# Altium PCB TTFT2.PcbDoc
Units mil, origin at the board's own origin, x right, y up, seen from the top; angles counter-clockwise.
Board outline 1130 x 662.65 mil, 4 copper layers (Top Layer, Internal Plane 1, Internal Plane 2, Bottom Layer), stack 30.634 mil thick; 52 components, 48 nets, 255 pads, 42 vias.
Unrouted connection lines stored in the file: 27.
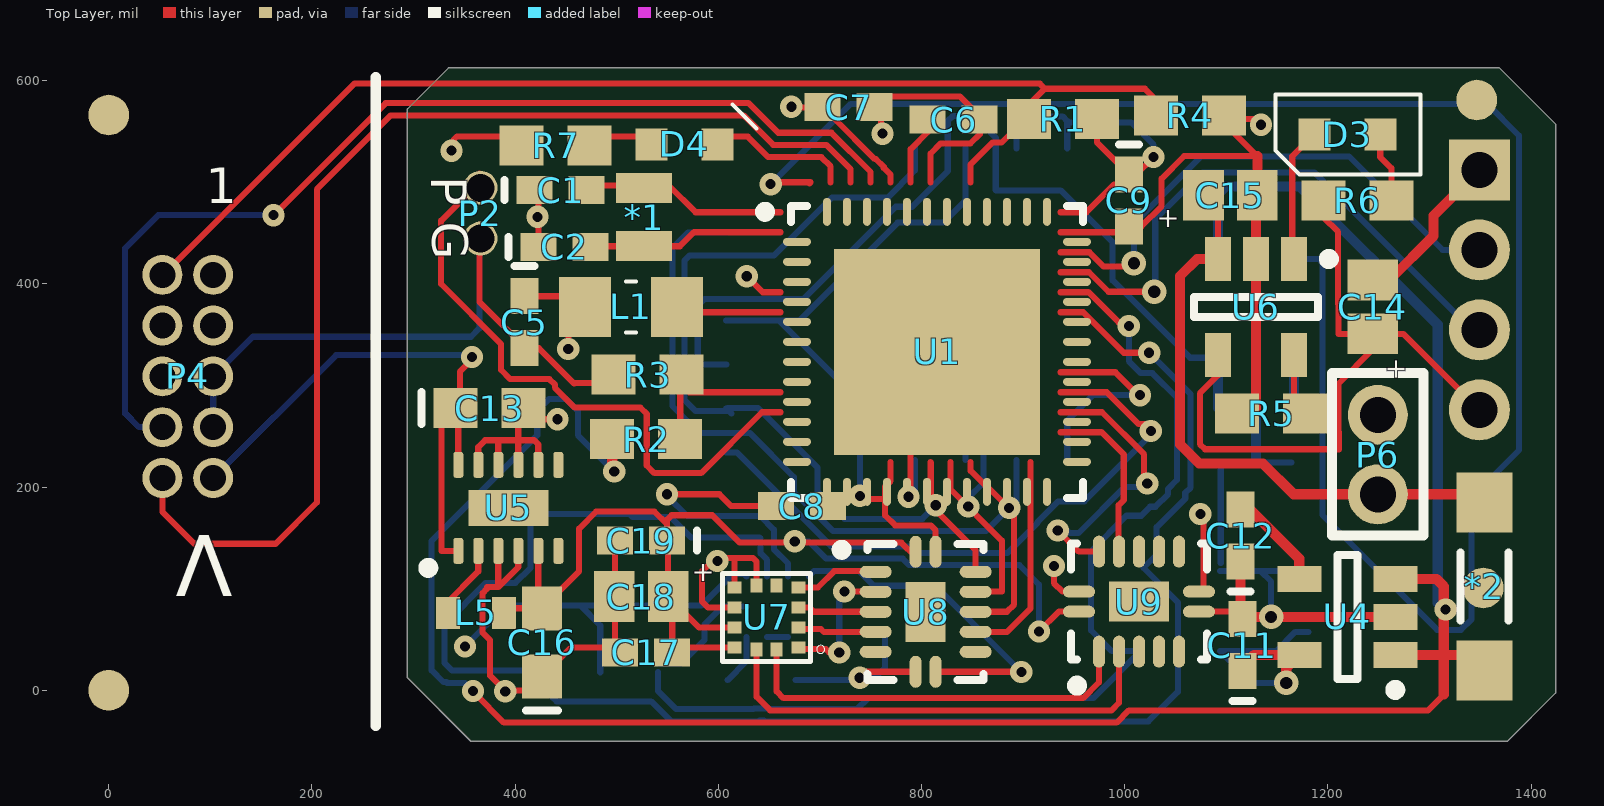
[diagram p0: Top Layer view]
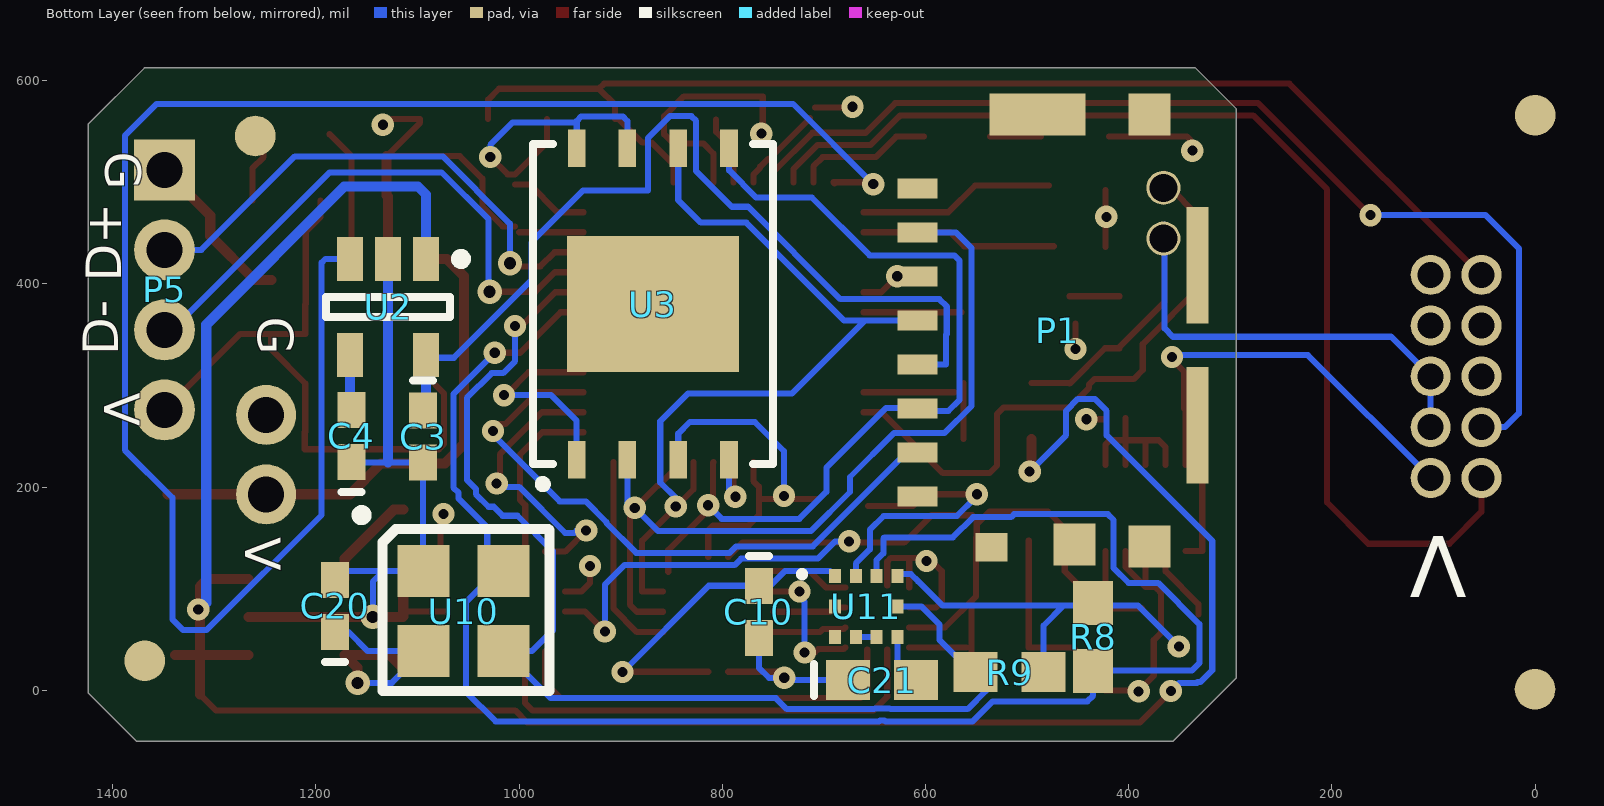
[diagram p1: Bottom Layer view, seen from below]
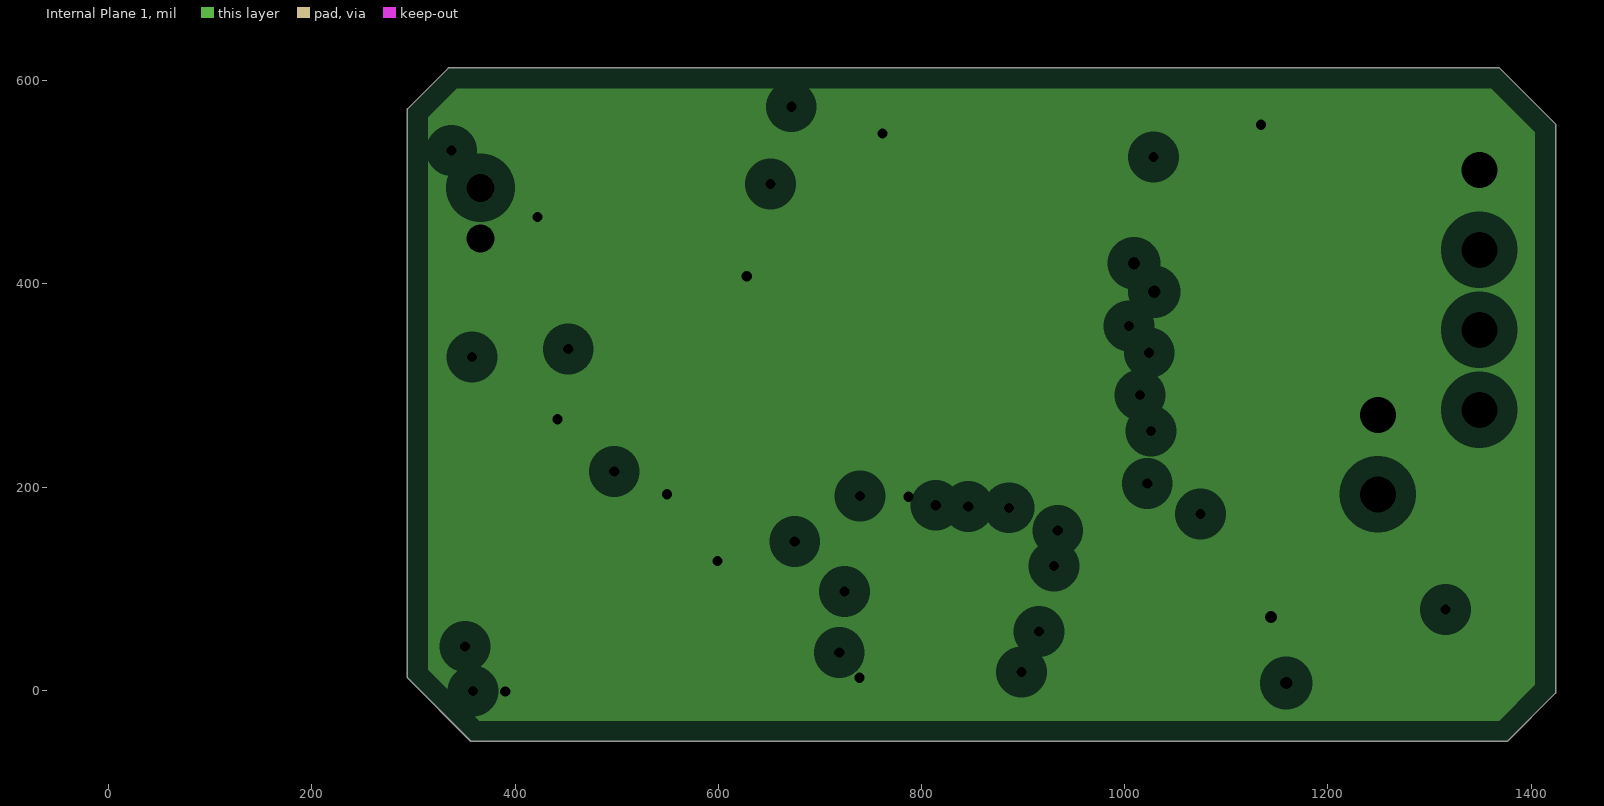
[diagram p2: Internal Plane 1, clearances drawn from the general rule]
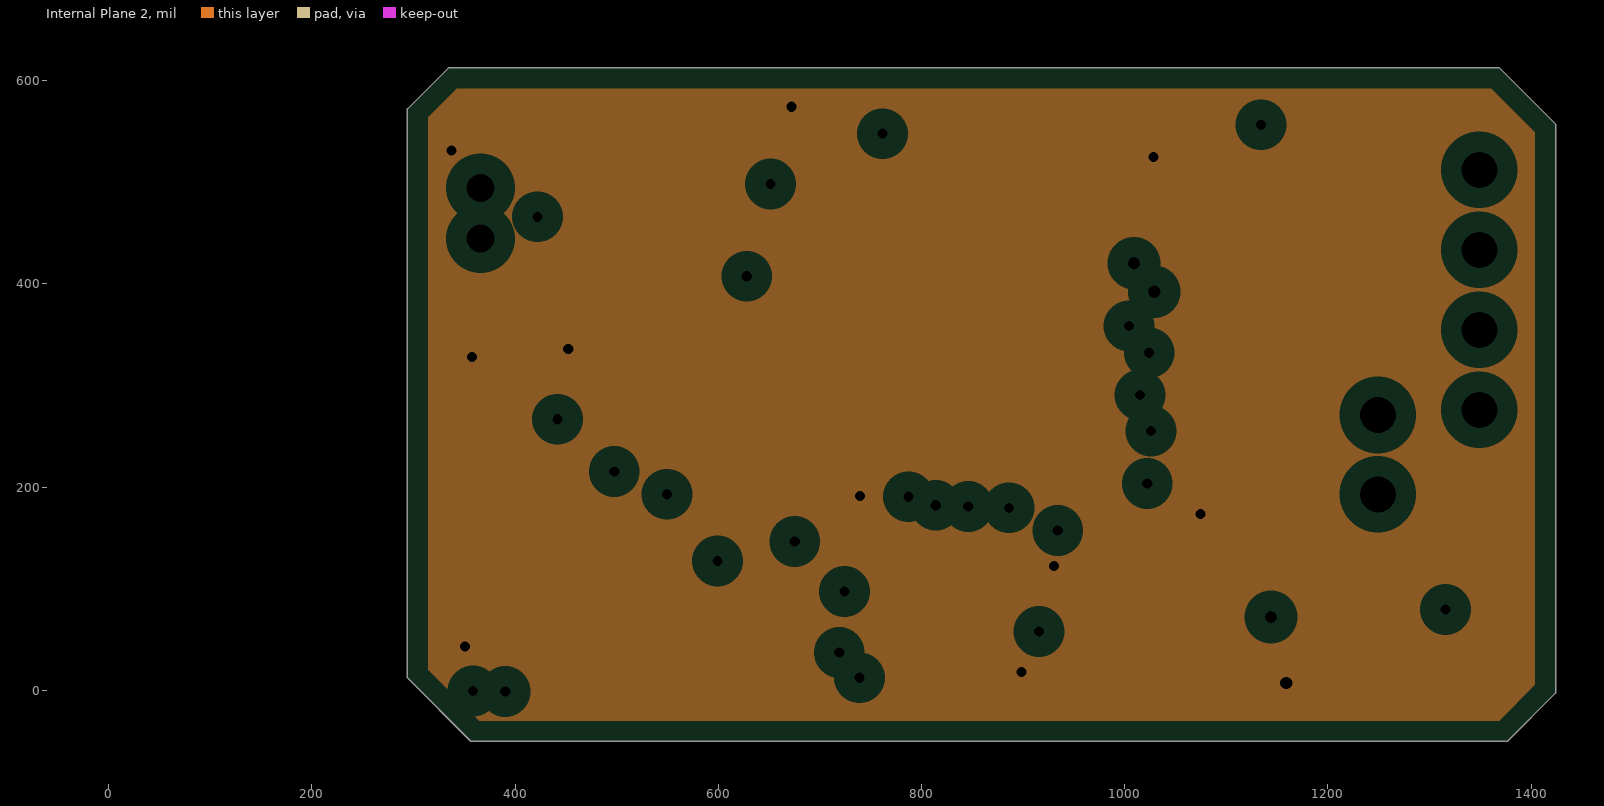
[diagram p3: Internal Plane 2, clearances drawn from the general rule]

## Layer stack, top to bottom
Top Solder: solder mask 0.4, Solder Resist, Dk 3.5
Top Layer: signal copper 1.4
Dielectric 1: core 10, FR-4, Dk 4.2
Internal Plane 1: plane copper 1.417, net GND
Dielectric 3: prepreg 5, Dk 4.2
Internal Plane 2: plane copper 1.417, net VCC
Dielectric 2: core 10, Dk 4.2
Bottom Layer: signal copper 1.4
Bottom Solder: solder mask 0.4, Solder Resist, Dk 3.5

## Board outline
294.02,12.28 294.02,572.28 334.3,612.56 1368.73,612.56 1424.02,557.28 1424.02,-2.72 1376.65,-50.09 356.38,-50.09

## Design rules (kind name [scope] priority, off if disabled: settings)
Clearance [All] p1: gap=6 ignorepadtopadclearanceinfootprint=FALSE except(0: Arc-Hole Track-Hole SMDPad-Hole THPad-Hole Via-Hole Fill-Hole Poly-Hole Region-Hole Text-Hole)
PlaneClearance [All] p1: clearance=20
PlaneConnect [All] p1: planeconnectstyle=Relief reliefexpansion=20 reliefentries=4 reliefconductorwidth=10 reliefairgap=10
PolygonConnect [All] p1: connectstyle=Relief reliefconductorwidth=10 reliefentries=4 polygonreliefangle="90 Angle" airgapwidth=10
RoutingVias [All] p1: holewidth=28 width=50 viastyle="Through Hole" minholewidth=10 minwidth=22 maxholewidth=28 maxwidth=50
SolderMaskExpansion [All] p1: expansion=4 istentingtop=FALSE
Width [All] p1: maxlimit=50 minlimit=6 preferedwidth=6
28 further rules are at their usual default settings.

## Components (designator, comment, footprint, x,y, rotation, side; value= is the part's Value field where it differs from the comment)
*1 "XTAL_ABS06" XTAL-ABS06 527,465.85 r90 top
*2 "Reed_MK24" "Reed MK24-B-3" 1354.02,102.28 r270 top
C1 "22.5pF" 0402 444.82,492.37 r0 top
C2 "22.5pF" 0402 448.46,436.48 r0 top
C3 "1.0uF" 0402 1094.47,249.66 r270 bottom
C4 "10nF" 0402 1165.01,250.43 r90 bottom
C5 "0.1uF" 0402 409.02,362.28 r270 top
C6 "0.1uF" 0402 831.64,561.8 r0 top
C7 "0.1uF" 0402 728.29,573.88 r0 top
C8 "0.1 uF" 0402 682.2,181.37 r180 top
C9 "0.1 uF" 0402 1004.02,482.28 r270 top
C10 "1.0uF" 0402 764.02,77.28 r270 bottom
C11 "1.0uF" 0402 1115.67,44.53 r90 top
C12 "10nF" 0402 1114.02,152.28 r90 top
C13 "C0603" 0603 374.9,277.67 r0 top
C14 "1uF" Tant0805 1244.02,377.28 r270 top
C15 "1uF" Tant0805 1104.02,487.28 r180 top
C16 "C0603" 0603 426.51,47.25 r90 top
C17 "100nF" 0402 529.02,37.28 r180 top
C18 "10uF" Tant0805 524.02,92.28 r0 top
C19 "100nF" 0402 524.02,147.28 r180 top
C20 "0.1uF" 0402 1180.99,83 r90 bottom
C21 "C0603" 0603 642.63,10.09 r180 bottom
D3 "LED_0603" Diode0603 1219.02,547.28 r180 top
D4 "LED_0603" Diode0603 566.65,537.33 r0 top
L1 "300Ohm" "0805 (M2125) Ferrite" 514.02,377.28 r180 top
L5 "2.2uH" "Inductor KLZ1608AHR" 361.3,76.19 r180 top
P1 "microSD" "Molex microSD" 607.8,190.92 r270 bottom
P2 "1x2 1.27mm" "Header1x2 1.27mm" 365.85,494.61 r180 top
P4 "Cortex Debug" Header_2x5_50mil 102.81,408.99 r180 top
P5 "HDR_4x1_2mm" Hdr_4x1_2mm 1349.02,512.28 r0 bottom
P6 "HDR_2x1_2mm" HDR_2x1_2mm 1249.02,192.28 r0 top
R1 "10K" 3-0603 939.02,562.28 r180 top
R2 "100k" 3-0603 529.02,247.28 r180 top
R3 "100k" 3-0603 530.33,310.63 r0 top
R4 "Do not place" 3-0603 1064.06,565.53 r0 top
R5 "2k" 3-0603 1144.02,272.28 r0 top
R6 "330X" 3-0603 1229.02,482.28 r0 top
R7 "330X" 3-0603 439.85,536.02 r0 top
R8 "4.7k" 3-0603 435.04,52.7 r270 bottom
R9 "4.7k" 3-0603 517.18,17.79 r180 bottom
U1 "ATSAMD21GA-MUT" QFN127P600-8N 815.22,333.18 r0 top
U2 "LP3985IM5-3.3" MF05A_N 1129.02,377.28 r270 bottom
U3 "W25Q256JVEIQ_TR" *SON127P800X600X80-9N 868.4,380.13 r90 bottom
U4 "LP3985IM5-3.3" MF05A_N 1219.02,72.28 r180 top
U5 "TPS62740" TPS6274x 344.02,137.28 r90 top
U6 "MCP73831T-2DCI/OT" SOT-23-OT5_N 1129.02,377.28 r270 top
U7 "LIS2DS12" LGA-12 679.02,42.28 r180 top
U8 "Level Shifter" DHVQFN14 804.02,77.28 r0 top
U9 "Level Shifter" DHVQFN14 1014.02,87.28 r90 top
U10 "MS5837" MS5837 1094.02,117.28 r180 bottom
U11 "MMC33160MT" MMC33160MT 689.02,112.28 r180 bottom

## Footprints (in the part's own frame and the unit in brackets; to place one, negate y for a bottom-side part, rotate by r counter-clockwise, add the part's x,y. Pads: shape width x height; smd on the part's side, far side on the other; paste and mask are expansions set on the pad)
3-0603 [mm] "Chip Resistor; Body 1.6 x 0.9 mm (LxW typ)"
  rect 1.1x1 smd: 1(-0.85,0) 2(0.85,0)
0402 [mm] "Chip Capacitor; Body 1.0 x 0.5 mm (LxW typ)"
  rect 0.9x0.7 smd: 1(-0.65,0) 2(0.65,0)
  silkscreen extent -1.4,-0.25 -1.4,0.25
0603 [mm] "Chip Capacitor; Body 1.6 x 0.8 mm (LxW typ)"
  rect 1.1x1 smd: 1(-0.85,0) 2(0.85,0)
  silkscreen extent -1.7,-0.4 -1.7,0.4
"0805 (M2125) Ferrite" [mm] "Chip Resistor; Body 2.0 x 1.3 mm (LxW typ)"
  rect 1.3x1.5 smd: 1(-1.15,0) 2(1.15,0)
  silkscreen extent -0.13,-0.64 0.13,0.64, body extent -1.15,-0.72 1.15,0.73, height 0.81
*SON127P800X600X80-9N [mm]
  rect 0.94x0.44 smd: 1(-3.895,1.905) 2(-3.895,0.635) 3(-3.895,-0.635) 4(-3.895,-1.905) 5(3.895,-1.905) 6(3.895,-0.635) 7(3.895,0.635) 8(3.895,1.905)
  rect 3.4x4.3 smd: 9(0,0)
  silkscreen extent -4.6,-3 4,3
DHVQFN14 [mm] "QFN, 14-Leads, Body 2.50x3.00mm, Pitch 0.50mm, Thermal Pad 1.00x1.50mm, IPC Medium Density"
  oval 0.3x0.8 smd: 1(-0.25,1.5) 7(-0.25,-1.5) 8(0.25,-1.5) 14(0.25,1.5)
  oval 0.8x0.3 smd: 2(-1.25,1) 3(-1.25,0.5) 4(-1.25,0) 5(-1.25,-0.5) 6(-1.25,-1) 9(1.25,-1) 10(1.25,-0.5) 11(1.25,0) 12(1.25,0.5) 13(1.25,1)
  rect 1x1.5 smd: 15(0,0)
  silkscreen extent -2.22,-1.7 1.45,1.7, body extent -1.3,-1.55 1.3,1.55, height 1
Diode0603 [mm]
  rect 0.8x0.8 smd: A(-0.825,0) K(0.825,0)
  silkscreen extent -1.83,-1 1.8,1
HDR_2x1_2mm [mm]
  round 1.5 hole 0.9: 1(0,0.016) 2(0,2)
  silkscreen extent -1.14,-1.02 1.14,3.05
Hdr_4x1_2mm [mil]
  rect 60x60 hole 35.43: 1(0,0)
  round 60 hole 35.43: 2(0,78.74) 3(0,157.48) 4(0,236.22)
"Header1x2 1.27mm" [mm]
  round 0.85 hole 0.7: 1(0,0) 2(0,1.27)
Header_2x5_50mil [mm]
  round 1 hole 0.65: 1(0,0) 2(1.27,0) 3(0,1.27) 4(1.27,1.27) 5(0,2.54) 6(1.27,2.54) 7(0,3.81) 8(1.27,3.81) 9(0,5.08) 10(1.27,5.08)
"Inductor KLZ1608AHR" [mm]
  rect 0.6x0.8 smd: 1(-0.7,0) 2(0.7,0)
LGA-12 [mm] "LIS2DS12"
  rect 0.35x0.3 smd: 1(0,0) 2(0,-0.5) 3(0,-1) 4(0,-1.5) 7(1.6,-1.5) 8(1.6,-1) 9(1.6,-0.5) 10(1.6,0)
  rect 0.3x0.35 smd: 5(0.55,-1.55) 6(1.05,-1.55) 11(1.05,0.05) 12(0.55,0.05)
  silkscreen extent -0.65,-1.85 1.9,0.35
MF05A_N [mm] "SOT23, 5-Leads, Body 2.9x1.6mm, Pitch 0.95mm, Lead Span 2.8mm, IPC Medium Density"
  rect 1.1x0.65 smd: 1(-1.2,0.95) 2(-1.2,0) 3(-1.2,-0.95) 4(1.2,-0.95) 5(1.2,0.95)
  silkscreen extent -1.32,-1.55 0.25,1.95, body extent -0.9,-1.55 0.9,1.55, height 1.19
MMC33160MT [mm] "Memsic magnetometer"
  rect 0.3x0.35 smd: 1(0,0) 2(0,-0.76) 3(0,-1.52) 4(0.52,-1.52) 5(1.04,-1.52) 6(1.56,-1.52) 7(1.56,-0.76) 8(1.56,0) 9(1.04,0) 10(0.52,0)
  silkscreen extent -0.85,0.03 -0.8,0.07
"Molex microSD" [mm] "wicked small microSD"
  rect 0.5x1 smd: 1(0,0) 2(-1.1,0) 3(-2.2,0) 4(-3.3,0) 5(-4.4,0) 6(-5.5,0) 7(-6.6,0) 8(-7.7,0)
  rect 1.05x2.4 smd: ""(-9.55,3)
  rect 1.05x1.05 smd: ""(-9.55,5.8) ""(1.2,3.925) ""(1.25,5.8)
  rect 2.91x0.55 smd: ""(-5.775,7) ""(-1.775,7)
  rect 0.72x0.8 smd: ""(1.275,1.85)
MS5837 [mm]
  rect 1.3x1.3 smd: 1(0,0) 2(0,-2) 3(2,-2) 4(2,0)
  silkscreen extent -1.67,-3 3.15,1.52
QFN127P600-8N [mm]
  oval 0.7x0.2 smd: 1(-3.5,2.75) 2(-3.5,2.25) 3(-3.5,1.75) 4(-3.5,1.25) 5(-3.5,0.75) 6(-3.5,0.25) 7(-3.5,-0.25) 8(-3.5,-0.75) 9(-3.5,-1.25) 10(-3.5,-1.75) 11(-3.5,-2.25) 12(-3.5,-2.75) 25(3.5,-2.75) 26(3.5,-2.25) 27(3.5,-1.75) 28(3.5,-1.25) 29(3.5,-0.75) 30(3.5,-0.25) 31(3.5,0.25) 32(3.5,0.75) 33(3.5,1.25) 34(3.5,1.75) 35(3.5,2.25) 36(3.5,2.75)
  oval 0.2x0.7 smd: 13(-2.75,-3.5) 14(-2.25,-3.5) 15(-1.75,-3.5) 16(-1.25,-3.5) 17(-0.75,-3.5) 18(-0.25,-3.5) 19(0.25,-3.5) 20(0.75,-3.5) 21(1.25,-3.5) 22(1.75,-3.5) 23(2.25,-3.5) 24(2.75,-3.5) 37(2.75,3.5) 38(2.25,3.5) 39(1.75,3.5) 40(1.25,3.5) 41(0.75,3.5) 42(0.25,3.5) 43(-0.25,3.5) 44(-0.75,3.5) 45(-1.25,3.5) 46(-1.75,3.5) 47(-2.25,3.5) 48(-2.75,3.5)
  rect 5.15x5.15 smd paste-1.778: 49(0,0)
  silkscreen extent -4.42,-3.65 3.65,3.65, body extent -3.5,-3.5 3.5,3.5, height 0.85
"Reed MK24-B-3" [mm] "Meder Reed Switch Surface Mount"
  rect 1.5x1.4 smd: 1(-2.1,0) 2(2.1,0)
  silkscreen extent -0.85,-0.6 0.85,0.6, body extent -2.75,-1.1 2.75,1.1, height 1.8
SOT-23-OT5_N [mm] "SOT23, 5-Leads, Body 2.9x1.7mm, Pitch 0.95mm, Lead Span 2.8mm, IPC Medium Density"
  rect 1.1x0.65 smd: 1(-1.2,0.95) 2(-1.2,0) 3(-1.2,-0.95) 4(1.2,-0.95) 5(1.2,0.95)
  silkscreen extent -1.32,-1.55 0.25,1.95, body extent -0.9,-1.55 0.9,1.55, height 1.45
Tant0805 [mil]
  rect 40x50 smd: 1(-26.5,0) 2(26.5,0)
TPS6274x [mm] "QFN, 12-Leads, Body 2.00x3.00mm, Pitch 0.50mm, Thermal Pad 0.90x2.00mm, IPC Medium Density"
  rrect50% 0.65x0.25 smd: 1(0,0) 2(0,-0.5) 3(0,-1) 4(0,-1.5) 5(0,-2) 6(0,-2.5) 7(2.15,-2.5) 8(2.15,-2) 9(2.15,-1.5) 10(2.15,-1) 11(2.15,-0.5) 12(2.15,0)
  rect 0.9x2 smd paste-0.1: 13(1.075,-1.25)
  silkscreen extent -0.55,0.63 -0.3,0.87, body extent 0.03,-2.8 2.12,0.3, height 0.8
XTAL-ABS06 [mm]
  rect 0.75x1.4 smd: 1(-0.725,0) 2(0.725,0)

## Part data
C1 C2 C3 C4 C5 C6 C7 C8 C9 C10 C11 C12 C17 C19 C20: library part C0402, "Ceramic Chip Capacitor - Standard"
C13 C16 C21: "Ceramic Chip Capacitor - Standard"
C14 C15 C18: library part Tant0805
L1: library part "Ferrite 0805(M2125) 3A", "Ferrite 25mOhm@DC,  60 Ohm@100MHz"
L5: library part "Inductor KLZ1608"
P1: library part "microSD Molex tiny"
P2: library part "Header 1x2 1.27mm"
P4: library part CortexDebug
R1 R2 R3 R4 R5 R6 R7 R8 R9: library part ERJ3RK, "Precision Thick Film Chip Resistor, 10 Ohm to 1M Ohm Range, 1% and 0.5% Tolerance, 0603 Size, 0.063 W"
U1: library part ATSAMD21G18
U2 U4: "Micropower, 150mA Low-Noise Ultra Low-Dropout CMOS Voltage Regulator, 5-pin SOT-23"
U3: "Ic Flash 256mbit 104mhz 8wson"
U5: library part TPS6274x
U6: "Miniature Single-Cell, Fully Integrated Li-Ion, Li-Polymer Charge Management Controller, 4.2V, 5-Pin SOT-23, Industrial Temperature, Tape and Reel"
U8 U9: library part NTB0104, "Voltage level translator"
U10: "Pressure/Temp"

## Free pads (board coordinates)
  round 40 smd paste-20 mask+5: 0(-0.11,-0.05) 0(0,566.19) 0(1346.53,580.96) 0(1352.81,100.66)
  round 40 smd far side paste-20 mask+5: 0(0,565.99) 0(0.07,0.93) 0(1259.67,545.58) 0(1368.51,29.02)

## Via types
v1: diameter 22, hole 10, Top Layer to Bottom Layer, 38 vias
v2: diameter 24, hole 12, Top Layer to Bottom Layer, tented bottom, 4 vias

## Nets (pads, with @x,y where several pads share a name; then routed paths per layer and width w, separated by ;. In a path a pad name is that pad's centre, name@x,y a point inside that pad or via, vN(x,y) a via of type N, cw(c..) or ccw(c..) an arc to the next point about the centre after c; other vN are vias at no path point)
A4: R2.1 R3.2 U1.10 | length 144.8
  Top Layer w6: R2.1 R3.2@562.48,302.28 ; R3.2@571.38,293.38 661.22,293.38
CS: P1.2 U1.27 | length 617.8
  Top Layer w6: 936.81,293.38 982.25,293.38 1013.36,262.28 v1@1024.02,262.28
  Bottom Layer w6: P1.2 618.32,234.23 710.96,141.58 786.49,141.58 792.84,135.24 884.75,135.24 914.02,164.51 914.02,165.56 934.41,185.96 960.14,185.96 1024.02,249.83 v1@1024.02,262.28
  other v1: 1025.73,255.16
CS2: U1.28 U3.1 | length 205.7
  Top Layer w6: 936.81,313.07 990.78,313.07 v1@1012.79,291.05
  Bottom Layer w6: U3.1 943.4,265.39 968.58,290.56 v1(1014.96,290.56)
CS_LIS: U1.24 U8.10 | length 202.9
  Top Layer w6: U8.10@857.91,57.28 884.02,57.28 907.28,80.55 907.28,224.48
CS_LIS_1.8: U7.2 U8.5 | length 73
  Top Layer w6: U7.2 680.7,60.28 701.02,60.28 704.02,57.28 U8.5@750.12,57.28
D+: P5.2 U1.34 | length 522.6
  Top Layer w6: 936.81,431.18 965.12,431.18 979.02,417.28 v2@1009.02,417.28
  Bottom Layer w6: v2(1009.02,420.28) 1009.02,459.39 1075.22,525.59 1220.7,525.59 1312.76,433.54 P5.2
D-: P5.3 U1.33 | length 574.1
  Top Layer w6: 936.81,411.49 964.8,411.49 984.02,392.28 v2(1029.02,392.28)
  Bottom Layer w6: v2(1029.02,392.28) 1030.02,393.28 1030.02,463.42 1076.41,509.81 1186.48,509.81 1341.5,354.8 P5.3
GND: C1.1 C2.1 C3.2 C4.1 C5.2 C6.2 C7.2 C8.2 C9.2 C10.2 C11.2 C12.1 C13.2 C14.1 C15.1 C16.1 C17.2 C18.1 C19.2 C20.2 C21.1 P1.6 P2.2 P4.5 P4.7 P5.1 P6.2 R3.1 R4.2 R5.1 U1.5 U1.18 U1.35 U1.42 U2.2 U3.4 U4.2 U5.3 U5.4 U5.8 U5.9 U5.10 U5.11 U6.2 U7.6 U7.7 U7.8 U8.7 U9.7 U10.1 U11.10 | length 3810.6
  Top Layer w6: U5.11 363.7,239.44 370.41,246.15 403.07,246.15 ; P2.2@364.75,458.51 364.75,382.25 409.02,337.99 C5.2 423.35,336.69 458.14,301.9 ; U5.3 383.39,101.65 ; U5.10 383.39,242.55 ; U5.4 403.07,121.33 383.39,101.65 ; U5.9 403.07,246.15 ; C13.2@403.07,267.87 403.07,246.15 ; U5.8 422.76,241.99 418.6,246.15 403.07,246.15 ; C2.1 C1.1@422.87,492.48 ; C13.2@422.98,266.78 v1(441.72,266.78) ; C16.1@423.52,-0.23 390.05,-0.23 375.46,14.36 375.46,14.61 375.33,14.74 375.33,49.43 368.04,56.71 368.04,95.66 372.16,99.78 372.16,101.65 383.39,101.65 ; C16.1 455.01,42.28 498.43,42.28 C19.2 ; 458.52,302.28 R3.1@495.55,302.28 ; v1(549.43,192.94) 600.99,192.94 612.55,181.37 C8.2 ; U7.8 589.65,81.65 584.02,87.28 584.02,117.28 597.02,130.28 614.02,130.28 ; U7.7 616.02,128.27 614.02,130.28 ; v1(627.88,407.6) 643.67,391.81 661.22,391.81 ; U7.6 637.68,126.62 634.02,130.28 614.02,130.28 ; v1(739.02,12.28) 744.96,18.22 U8.7 ; v1@763.42,551.2 760.25,554.37 760.25,584.58 837.77,584.58 857.24,565.11 C6.2 857.24,547.29 848.16,538.22 818.72,538.22 808.86,528.36 808.86,500.07 ; v1@788.96,190.66 788.96,233.02 ; 936.81,450.86 C9.2@999.84,450.86 ; C9.2 1016.36,456.69 1036.22,476.54 1036.22,503.71 1058.29,525.78 1130.52,525.78 1097.48,558.81 1097.48,562.28 v1@1128.42,562.28 ; U9.7 C11.2@1109.45,77.44
  Top Layer w10: C11.2@1114.02,72.87 C12.1 ; C11.2@1114.61,72.28 v2(1144.02,72.28) U4.2 ; R5.1@1129.02,277.28 U6.2 C15.1@1129.02,485.78 ; C15.1 1130.52,525.78 ; C14.1 1260.52,403.78 1304.02,447.28 1304.02,467.28 P5.1
  Bottom Layer w6: P4.7 P4.5 141.81,347.98 356.55,347.98 364.75,356.18 P2.2@364.75,458.51 ; v1@551.09,189.67 569.18,171.57 641.18,171.57 654.69,158.07 654.69,138.86 668.54,125 U11.10 ; C21.1 v1@736.83,10.09 ; v1(739.02,12.28) 754.07,12.28 764.02,22.22 C10.2 ; v1@785.51,183.41 788.96,186.86 788.96,190.66 793.4,195.11 U3.4 ; U10.1 1133.82,117.28 ; U10.1@1094.47,125.15 C3.2 C4.1@1164.25,224.07 ; v2(1144.02,72.28) 1144.02,107.08 1133.82,117.28 ; C20.2@1172.3,117.28 1133.82,117.28
  Bottom Layer w10: 1129.02,224.41 U2.2
  other v1: 390.24,-1.06 599.02,127.28 787.18,190.51 421.98,466 761.55,547.87 1134.09,556.62
INT1: U1.26 U9.13 | length 298.4
  Top Layer w6: v1(934.02,157.28) 954.8,136.49 U9.13 ; 936.81,273.7 977.6,273.7 1019.02,232.28 1019.02,212.28 v1@1029.02,202.28
  Bottom Layer w6: v1(934.02,157.28) 943.34,157.28 945.79,154.82 954.64,154.82 999.97,200.16 1026.9,200.16 v1@1029.02,202.28
  other v1: 1022.19,203.48
INT1_1.8: U7.12 U9.2 | length 398
  Top Layer w6: U7.12 657.36,-1.07 664.02,-7.72 959.02,-7.72 974.65,7.91 U9.2
INT2: U1.25 U9.12 | length 168.3
  Top Layer w6: 936.81,254.01 977.28,254.01 999.02,232.28 999.02,187.28 994.02,182.28 U9.12@994.02,137.28
INT2_1.8: U7.11 U9.3 | length 462.4
  Top Layer w6: U7.11 637.68,-6.38 651.02,-19.72 987.02,-19.72 994.33,-12.41 U9.3
LED1: D4.K U1.47 | length 136.4
  Top Layer w6: D4.K@601.63,544.89 628.88,544.89 649.03,524.74 701.27,524.74 710.43,515.58 710.43,500.07
MISO: P1.7 U1.21 U3.2 U8.11 | length 861.1
  Top Layer w6: 848.23,224.48 848.23,216.03 862.56,201.7 863.45,201.7 891.02,174.13 891.02,84.28 884.02,77.28 U8.11@858.23,77.28
  Bottom Layer w6: P1.7 570.3,450.76 554.73,435.2 554.73,279.82 581.48,253.07 631.21,253.07 674.35,209.93 674.35,195.17 712.86,156.65 863.21,156.65 v1(886.14,179.59) ; v1@888.3,177.43 893.4,182.54 U3.2
MISO_1.8: U7.3 U8.4 | length 72.6
  Top Layer w6: U7.3 689.65,81.65 694.02,77.28 U8.4@749.8,77.28
MOSI: P1.3 U1.19 U3.5 U8.13 | length 873.9
  Top Layer w6: 808.86,224.48 809.02,224.32 809.02,182.28 853.23,138.07 U8.13
  Bottom Layer w6: P1.3 P1.3@612.87,272.46 ; P1.3@608.86,277.79 639.08,277.79 697.63,219.25 697.63,195.35 724.22,168.76 800.67,168.76 v1(814.02,182.11) ; P1.3@610.33,275 577.37,275 566.73,285.64 566.73,423.14 571.74,428.15 654.93,428.15 711.74,484.96 766.68,484.96 793.4,511.68 U3.5
MOSI_1.8: U7.4 U8.2 | length 76.8
  Top Layer w6: U7.4 698.07,101.33 714.02,117.28 U8.2@749.17,117.28
Net*1_1: *1.1 C2.2 U1.2 | length 193.1
  Top Layer w6: C2.2@473.82,437.07 562.12,437.07 575.91,450.86 661.22,450.86
Net*1_2: *1.2 C1.2 U1.1 | length 193.6
  Top Layer w6: C1.2@478.57,496.87 551.28,496.87 577.6,470.55 661.22,470.55
NetC4_2: C4.2 U2.4 | length 52.6
  Bottom Layer w10: C4.2@1166.42,277.42 U2.4
NetC6_1: C6.1 U1.43 | length 68.7
  Top Layer w6: 789.17,500.07 789.17,532.61 806.05,549.49 C6.1
NetC12_2: C12.2 U4.4 | length 97.6
  Top Layer w10: C12.2 1123.43,177.87 1171.77,129.52 U4.4
NetC21_2: C21.2 U11.6 | length 50
  Bottom Layer w6: C21.2 627.6,28.52 U11.6
NetD3_A: D3.A R6.2 | length 69.5
  Top Layer w6: D3.A 1251.5,524.8 1262.48,513.81 R6.2
NetD3_K: D3.K U6.1 | length 132.3
  Top Layer w6: U6.1 1164.9,426.04 1164.9,525.64 D3.K
NetD4_A: D4.A R7.2 | length 50.1
  Top Layer w6: R7.2@486.53,544.89 D4.A@536.67,544.89
NetL1_1: L1.1 U1.6 | length 96.8
  Top Layer w6: L1.1@564.45,372.12 661.22,372.12
NetL5_2: L5.2 U5.2 | length 76
  Top Layer w6: L5.2@331.46,74.6 331.46,84.72 363.7,116.96 U5.2
NetR5_2: R5.2 U6.5 | length 56.7
  Top Layer w6: R5.2@1166.42,273.34 U6.5
NetU11_4: U11.4 U11.5 | length 20.5
  Bottom Layer w6: U11.5 U11.4
O2POW: U1.13
PA20: U1.29
PA21: U1.30
PWM: P2.1 U1.11 | length 606.8
  Top Layer w6: P2.1@364.75,508.51 364.75,499.9 327.16,462.31 327.16,399.9 386.24,340.82 386.24,315.24 395.13,306.35 433.75,306.35 439.02,301.08 439.02,298 458.8,278.22 523.35,278.22 529.49,272.07 529.49,221.25 537.03,213.71 582.98,213.71 642.96,273.7 661.22,273.7
RESET: P4.2 R1.2 R4.1 U1.40 | length 1211.1
  Top Layer w6: P4.2 53.58,408.99 241.79,597.2 916.29,597.2 921.41,592.08 ; 848.23,500.07 848.23,517.58 869.66,539.02 878.68,539.02 901.94,562.28 R1.2 905.55,576.22 921.41,592.08 ; R4.1@1030.55,562.28 1030.55,581.35 1019.82,592.08 921.41,592.08
SCK: P1.5 U1.20 U3.6 U8.12 | length 837.2
  Top Layer w6: 828.54,224.48 828.54,197.66 879.02,147.18 879.02,97.28 U8.12@858.54,97.28
  Bottom Layer w6: P1.5 659.43,364.15 ; U3.6 843.4,482.47 821.18,460.24 776.42,460.24 680.33,364.15 659.43,364.15 ; v1(845.89,180.89) 845.89,189.37 861.07,204.55 861.07,264.84 833.7,292.2 731.38,292.2 659.43,364.15
SCK_1.8: U7.1 U8.3 | length 126.7
  Top Layer w6: U7.1 680.7,40.59 705.7,40.59 709.02,37.28 v1(719.02,37.28) ; v1@724.02,92.28 729.02,97.28 U8.3@749.49,97.28
  Bottom Layer w6: v1(719.02,37.28) 719.02,87.28 v1@724.02,92.28
  other v1: 724.02,97.28
SCL: R9.1 U1.32 U10.3 U11.7 | length 1165.5
  Top Layer w6: 936.81,391.81 964.49,391.81 994.02,362.28 1009.02,362.28 1005.34,358.6 v1(1004.07,358.6)
  Bottom Layer w6: R9.1@540.48,17.99 540.48,-0.53 558.55,-18.6 634.54,-18.6 635.34,-17.8 649.92,-17.8 650.71,-18.6 736.43,-18.6 747.37,-7.66 969.08,-7.66 U10.3 987.35,38.54 966.76,59.14 966.76,136.99 1001.58,171.82 1016.2,171.82 1025.01,180.62 1030.14,180.62 1042.63,193.11 1042.63,198.24 1051.44,207.05 1051.44,287.88 1027.05,312.28 1015.73,312.28 1004.02,323.99 1004.02,357.28 1005.34,358.6 v1(1004.07,358.6) ; R9.1@541.49,26.3 563.01,26.3 586.4,49.69 586.4,64.85 603.9,82.36 U11.7
SD_POW: U1.48 U2.3 | length 1794.9
  Top Layer w6: v1(651.46,498.2) 653.33,500.07 690.75,500.07 689.76,499.08
  Bottom Layer w6: v1(651.46,498.2) 730.45,577.19 1356.83,577.19 1388.02,546.01 1388.02,236.47 1341.34,189.79 1341.34,69.97 1330.88,59.51 1307.52,59.51 1194.48,172.55 1194.48,420.78 1190.74,424.52 U2.3
SD_VCC: C3.1 P1.4 U2.5 | length 908.3
  Bottom Layer w6: P1.4 579.69,320.84 579.69,349.99 579.11,350.58 579.11,377.84 586.3,385.03 683.72,385.03 774.61,475.92 790.62,475.92 825.74,511.04 825.74,560.4 830.53,565.19 851.58,565.19 873.06,543.71 873.06,492.32 873.42,491.96 936.85,491.96 988.02,440.79 988.02,403.58 1064.29,327.3 U2.5@1093.23,327.3
  Bottom Layer w10: C3.1@1091.61,278.1 U2.5
SDA: R8.2 U1.31 U10.4 U11.9 | length 1726.8
  Top Layer w6: 936.81,372.12 959.17,372.12 999.02,332.28 v1@1019.02,332.28
  Bottom Layer w6: U11.9 648.07,128.34 641.51,134.9 641.51,149.44 640.51,150.44 573.04,150.44 553.09,170.39 515.78,170.39 512.82,173.34 420.63,173.34 414.92,167.64 414.92,120.35 400.23,105.66 371.05,105.66 330.48,65.09 330.48,26.85 338.02,19.32 434.96,19.32 R8.2 435.04,-5.15 440.79,-10.9 533.88,-10.9 553.58,-30.6 639.51,-30.6 640.31,-29.8 644.95,-29.8 645.74,-30.6 1023.16,-30.6 1052.33,-1.43 1052.33,86.58 1018.45,120.46 1031.41,133.41 1031.41,160.56 1059.58,188.73 1059.58,194.4 1064.75,199.57 1064.75,291.54 v1(1024.02,332.28)
SWCLK: P4.8 U1.45 | length 1032.9
  Top Layer w6: v1@164.18,469.48 272.59,577.88 629.83,577.88 638.38,569.33 658.97,548.74 711.21,548.74 749.8,510.15 749.8,500.07
  Bottom Layer w6: P4.8 29.78,258.99 16.03,272.74 16.03,434.89 48.82,467.69 v1(162.09,467.69)
SWDIO: P4.10 U1.46 | length 1113.5
  Top Layer w6: P4.10 52.81,175.75 84.28,144.27 164.22,144.27 204.77,184.83 204.77,493.1 277.56,565.88 624.86,565.88 626.38,564.36 654,536.74 706.24,536.74 730.12,512.86 730.12,500.07
V1.8: C16.2 C17.1 C18.2 C19.1 L5.1 U5.5 U7.9 U7.10 U8.1 U9.1 | length 1169.4
  Top Layer w6: L5.1@386.58,79.84 387.48,80.74 C16.2@424.02,80.74 ; C16.2@422.76,82 U5.5 ; C16.2 462.93,117.14 462.93,159.23 479.7,176 537.08,176 549.61,163.47 ; C19.1@539.02,150.28 C19.1@544.02,145.28 ; C19.1 549.61,163.47 ; C19.1@550.52,150.13 C18.2 580.83,61.96 U7.9 ; C17.1 C18.2@554.61,86.3 ; C17.1@559.61,42.28 U7.10 ; U8.1@794.17,131.33 780.23,145.28 621.02,145.28 594.02,172.28 554.02,172.28 549.61,167.87 549.61,163.47 ; v1(915.59,57.93) 935.1,77.44 U9.1
  Bottom Layer w6: v1(675.24,146.58) 688.99,146.58 705.99,129.58 781.52,129.58 787.87,123.24 896.38,123.24 915.59,104.03 v1(915.59,57.93)
V_BATT: *2.1 C15.2 P6.1 U6.3 | length 570.5
  Top Layer w6: U6.3 C15.2@1091.61,473.18
  Top Layer w10: U6.3 1071.24,424.52 1054.42,407.71 1054.42,242.08 1073.22,223.28 1135.97,223.28 1166.34,192.91 P6.1 *2.1@1346.06,192.91
VBUS: C14.2 P5.4 R6.1 U6.4 | length 668.9
  Top Layer w6: U6.4 1091.61,309.88 1074.02,292.28 1074.02,242.28 1079.02,237.28 1211.04,237.28 1211.04,253.95 1210.49,254.5 1210.49,301.99 1244.02,335.52 C14.2 ; R6.1 1195.55,465.74 1210.02,451.28 1210.02,380.05 1210.52,379.55 1210.52,350.78 C14.2 ; P5.4 1274.3,350.78 C14.2
VCC: C5.1 C7.1 C8.1 C9.1 C10.1 C11.1 C13.1 C20.1 L1.2 P4.9 R1.1 R7.1 R8.1 R9.2 U1.17 U1.36 U1.44 U3.3 U3.7 U3.8 U4.5 U5.1 U5.12 U8.8 U8.14 U9.8 U9.14 U10.2 U11.1 U11.8 | length 2791.4
  Top Layer w6: C13.1@327.59,259.32 327.59,137.28 U5.1 ; v1(337.4,531.21) 331.64,531.21 339.13,538.7 339.13,541.61 342.75,545.23 R7.1@419.26,545.23 ; U5.12 C13.1@344.02,275.74 ; C13.1@345.55,277.28 345.55,313.6 v1@359.11,327.16 ; C5.1 L1.2@458.15,387.87 ; v1(452.32,336) 452.32,328.86 459.78,336.32 452.45,336.32 L1.2@452.45,360.99 ; v1@672.42,573.82 C7.1@708.52,573.82 ; C8.1@706.26,188.46 762.01,188.46 ; C7.1@713.64,563.28 754.07,522.85 755.16,522.85 762.74,515.27 762.74,514.18 769.49,507.43 769.49,500.07 ; 769.49,224.48 769.49,205.82 764.02,200.35 764.02,172.28 774.02,162.28 809.02,162.28 813.86,157.44 U8.14@813.86,131.33 ; U8.8 894.96,18.22 894.65,17.91 v1@898.48,17.91 ; v1(930.29,122.41) 930.29,105.59 938.76,97.12 U9.14 ; 936.81,470.55 962.28,470.55 989.61,497.87 C9.1@1004.02,497.87 ; R1.1 972.48,539.4 C9.1 1011.38,507.87 v1(1028.36,524.84) ; U9.8 1077.4,101.44 v1@1077.4,178
  Top Layer w10: C11.1@1114.02,21.69 1127.2,34.88 U4.5 1159.02,22.12 v2(1159.02,7.28)
  Bottom Layer w6: P4.9 223.81,329.99 355.45,329.99 v1(357.46,327.98) ; v1(350.64,43.15) 391.05,83.56 463.96,83.56 ; R9.2 483.72,63.8 463.96,83.56 ; U11.8 625.39,114.49 614.51,114.49 607.3,107.28 607.15,107.28 583.43,83.56 463.96,83.56 ; U11.1 694.02,117.28 738.41,117.28 752.82,102.87 C10.1 813.38,102.87 v1(898.23,18.02) ; v1(739.3,191.35) 739.3,235.29 768.11,264.09 831.99,264.09 843.4,252.67 U3.3 ; U3.7 893.4,560.33 897.89,564.81 938.84,564.81 943.4,560.24 943.4,559.01 ; v1(1028.36,524.84) 1028.36,536.9 1006.25,559.01 943.4,559.01 ; v2(1159.02,7.28) 1125.28,7.28 U10.2 1149.05,38.54 1167.93,57.41 C20.1 ; 943.4,559.01 U3.8 943.19,533.69 943.19,559.01 943.4,559.01
  other v1: 1074.46,173.46 671.83,574.42
VIN: *2.2 R2.2 U2.1 U4.1 U4.3 | length 2331.2
  Top Layer w6: v1@360.04,-2.81 388.95,-31.72 991.99,-31.72 1003.99,-19.72 1298.49,-19.72 1314.02,-4.2
  Top Layer w10: v1@495.55,217.33 R2.2 ; U4.1 1314.02,34.88 ; U4.3 1306.61,109.68 1314.02,102.28 1314.02,34.88 ; 1314.02,-4.2 1314.02,34.88 ; *2.2@1338.74,34.88 1314.02,34.88
  Bottom Layer w6: v1(358.52,-0.68) 350.52,7.32 333.05,7.32 332.38,7.98 329.47,7.98 317.75,19.69 317.75,147.08 421.72,251.04 421.72,275.07 433.43,286.78 450,286.78 461.72,275.07 461.72,251.17 v1(497.59,215.3)
  Bottom Layer w10: U2.1 1091.61,487.96 1099.47,495.81 1172.06,495.81 1308.02,359.86 1308.02,86.05 v1@1314.31,79.75
  other v1: 1315.81,79.51
pads on no net: P1. P1.1 P1.8 P4.1 P4.3 P4.4 P4.6 U1.3 U1.4 U1.7 U1.8 U1.9 U1.12 U1.14 U1.15 U1.16 U1.22 U1.23 U1.37 U1.38 U1.39 U1.41 U1.49 U3.9 U5.6 U5.7 U5.13 U7.5 U8.6 U8.9 U8.15 U9.4 U9.5 U9.6 U9.9 U9.10 U9.11 U9.15 U11.2 U11.3

## Polygon pours and split planes (outlines as drawn)
GND on Internal Plane 1 (split plane): 1403.92,548.95 1403.92,5.6 1368.32,-29.99 364.71,-29.99 314.11,20.6 314.11,563.95 342.62,592.46 1360.41,592.46
VCC on Internal Plane 2 (split plane): 1403.92,548.95 1403.92,5.6 1368.32,-29.99 364.71,-29.99 314.11,20.6 314.11,563.95 342.62,592.46 1360.41,592.46

## Silkscreen, mask and mechanical layers (free items; w line width, h text height)
Top Overlay:
  lines w10: 262.73,-34.88 262.73,603.73
  text "P" at 305.65,506.14 h60 r270
  text "1" at 95.64,467.72 h60
  text "G" at 306.77,461.29 h60 r270
  text "V" at 121.97,152.73 h60 r180
Bottom Overlay:
  text "G" at 1419.28,530.13 h60 r90
  text "D+" at 1379.94,402.25 h60 r270
  text "G" at 1268.94,367.6 h60 r90
  text "D-" at 1382.65,329.66 h60 r270
  text "V" at 1419.96,293.03 h60 r90
  text "V" at 123.57,151.44 h60 r180
  text "V" at 1281.36,150.82 h60 r90
Mechanical 1:
  lines w10: 334.3,612.56 1368.73,612.56 1424.02,557.28 1424.02,-2.72 1376.65,-50.09 -28.73,-50.09 -46.93,-31.89 -46.93,593.9 -28.23,612.6 348.9,612.6

## Text inside footprints (layer, text, board x,y; h text height)
C14: Top Overlay "+" at 1259.02,327.28 h19.68 r270
C15: Top Overlay "+" at 1054.02,472.28 h19.68 r180
C18: Top Overlay "+" at 574.02,107.28 h19.68